# Altium PCB PowerSupply.PcbDoc
Units mm, origin at the board's own origin, x right, y up, seen from the top; angles counter-clockwise.
Board outline 30.1 x 30.23 mm, 2 copper layers (Top Layer, Bottom Layer); 69 components, 44 nets, 231 pads, 0 vias.
Unrouted connection lines stored in the file: 41.
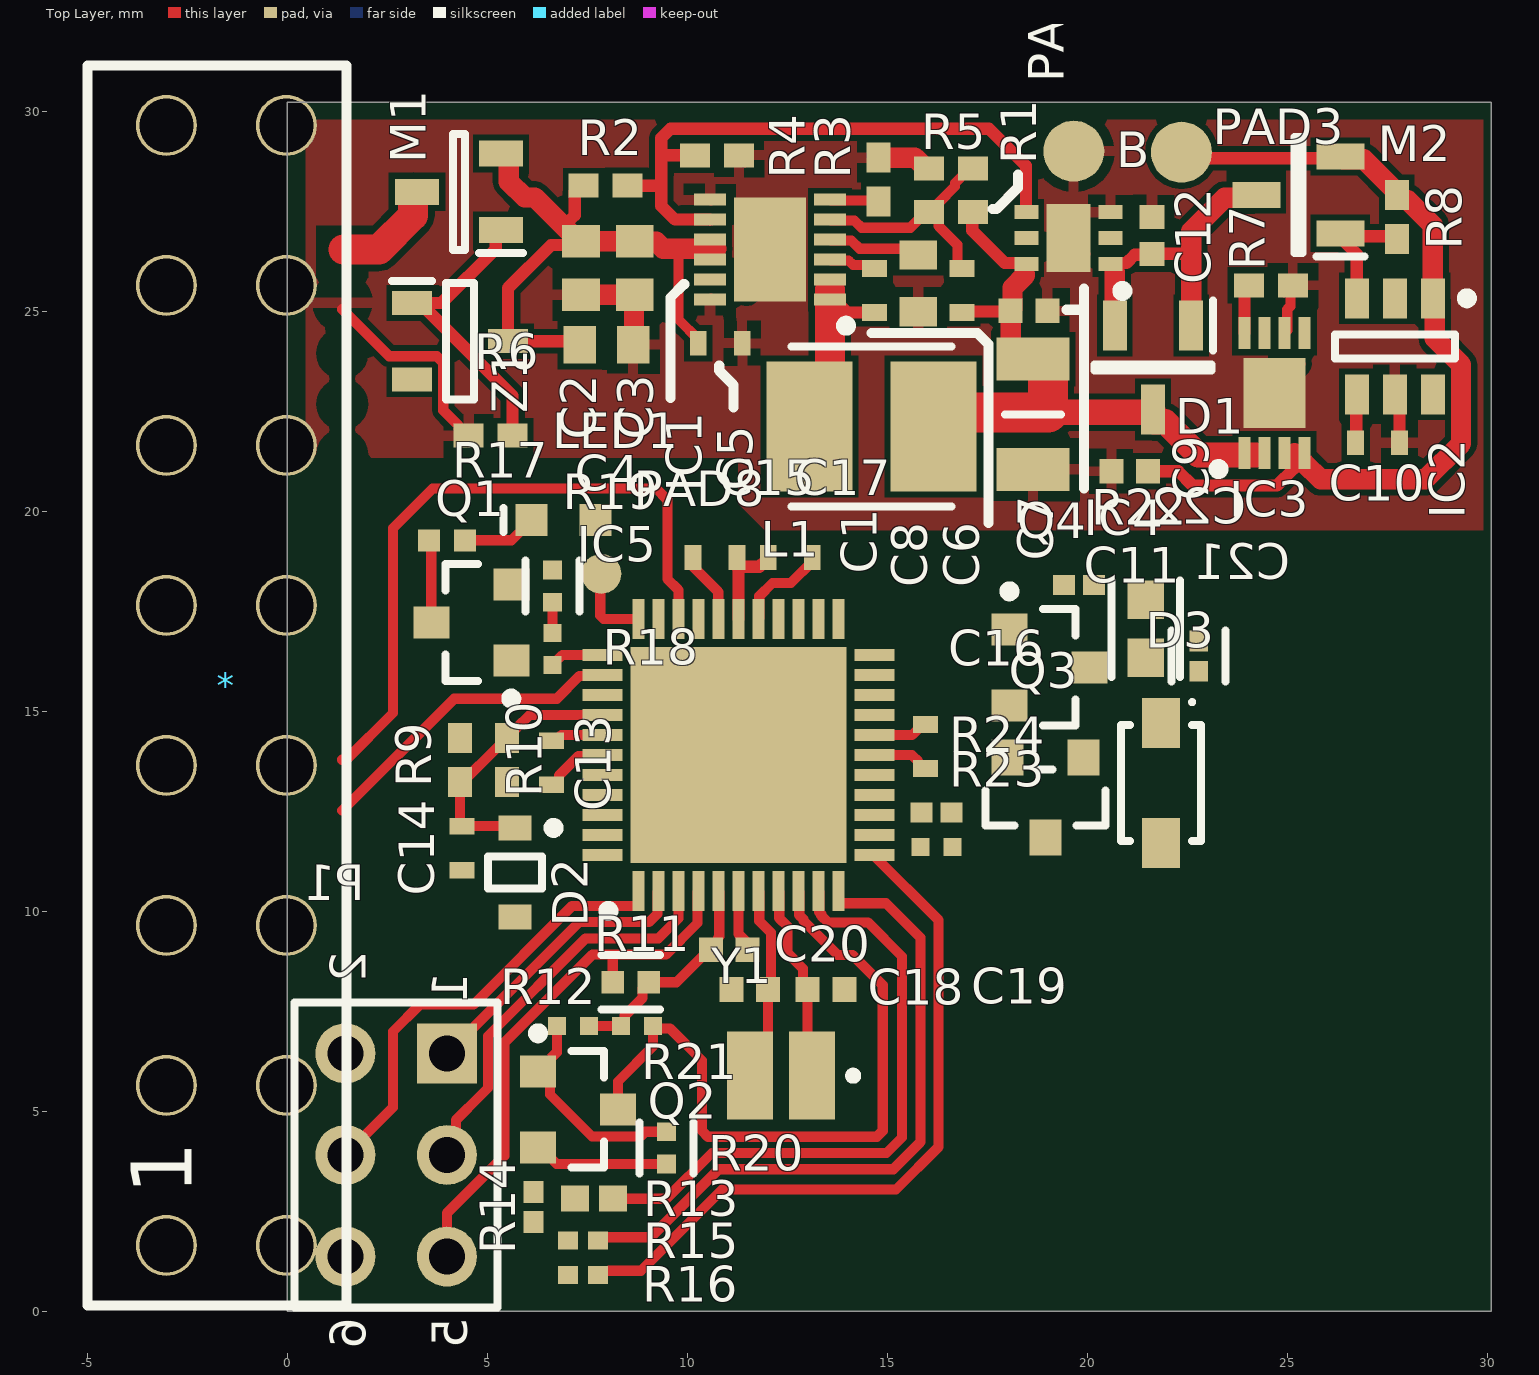
[diagram p0: Top Layer view]
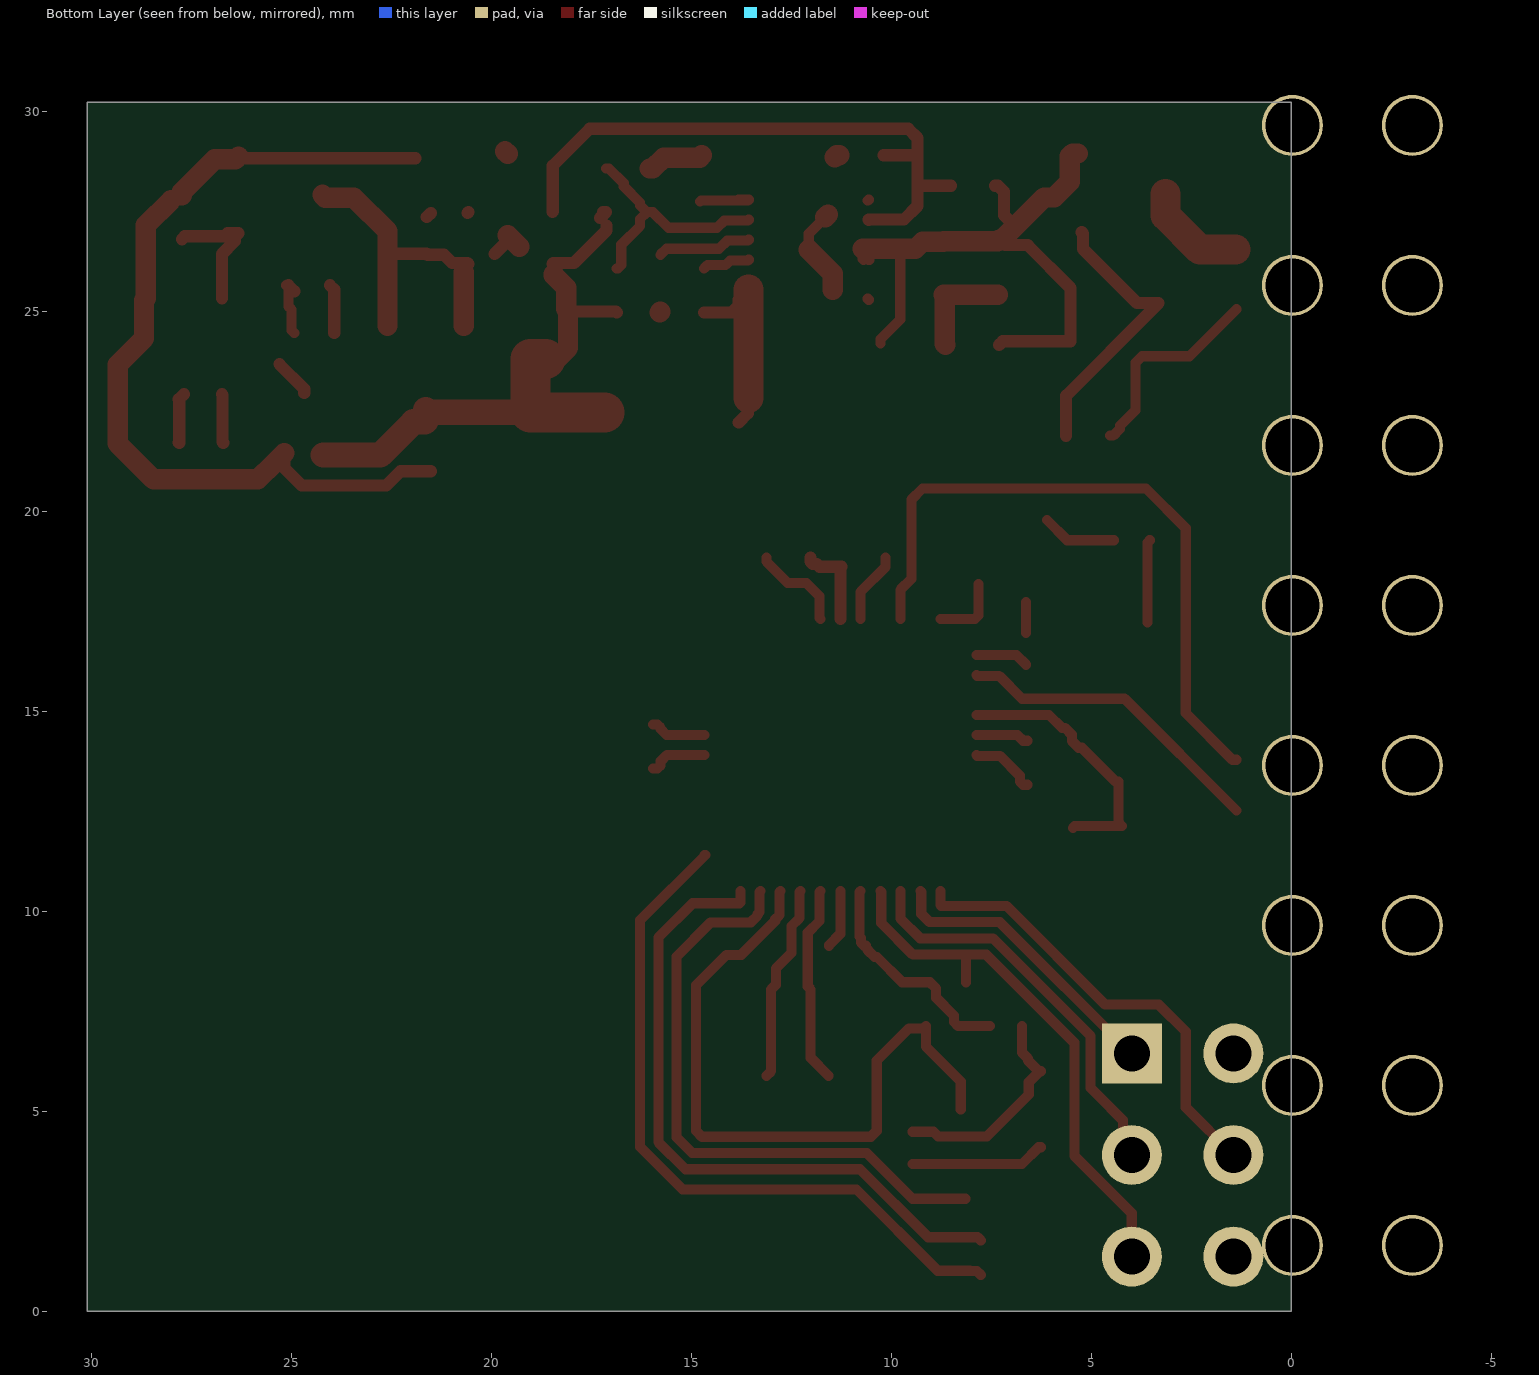
[diagram p1: Bottom Layer view, seen from below]

## Layer stack, top to bottom
Top Solder: solder mask 0.0102, Solder Resist, Dk 3.5
Top Layer: signal copper 0.0356
Dielectric 1: dielectric 0.32, FR-4, Dk 4.8
Bottom Layer: signal copper 0.0356
Bottom Solder: solder mask 0.0102, Solder Resist, Dk 3.5

## Board outline
0,0 30.099,0 30.099,30.226 0,30.226

## Design rules (kind name [scope] priority, off if disabled: settings)
Clearance [All] p1: gap=0.152 ignorepadtopadclearanceinfootprint=FALSE
PolygonConnect [All] p1: connectstyle=Relief reliefconductorwidth=0.254 reliefentries=4 polygonreliefangle="90 Angle" airgapwidth=0.254
RoomDefinition Control [InComponentClass('Control')] p1 off: confinementstyle=ConfineIn formatcopy=TRUE lockcomponents=FALSE outline 31.242,1.397 62.255,1.397 62.255,12.573 31.242,12.573
RoomDefinition PowerSupply [InComponentClass('PowerSupply')] p2 off: confinementstyle=ConfineIn formatcopy=TRUE lockcomponents=FALSE outline 34.027,-24.384 183.252,-24.384 183.252,77.089 34.027,77.089
RoutingVias [All] p1: holewidth=0.711 width=1.27 viastyle="Through Hole" minholewidth=0.711 minwidth=1.27 maxholewidth=0.711 maxwidth=1.27
SolderMaskExpansion [All] p1: expansion=0.102 istentingtop=FALSE
Width [All] p1: maxlimit=1 minlimit=0.254 preferedwidth=0.254
30 further rules are at their usual default settings.

## Classes and differential pairs
component class Control: C13 C14 C15 C16 C17 C18 C19 C20 C21 C22 D2 D3 IC5 LED1 P1 PAD8 Q1 Q2 Q3 Q4 R9 R10 R11 R12 R13 R14 R15 R16 R17 R18 R19 R20 R21 R22 R23 R24 Y1
component class PowerSupply: * C1 C2 C3 C4 C5 C6 C7 C8 C9 C10 C11 C12 D1 IC1 IC2 IC3 IC4 L1 M1 M2 PAD3 PAD4 R1 R2 R3 R4 R5 R6 R7 R8 Z1

## Components (designator, comment, footprint, x,y, rotation, side; value= is the part's Value field where it differs from the comment)
* "OBD2 connector" OBD2 -3.025,1.652 r90 top (schematic designator *1)
C1 "100n" CAPC1005X55N#1 14.681,25.527 r270 top
C2 "4.7u" CAPC1608X100N 7.341,26.086 r90 top
C3 "4.7u" CAPC1608X100N 8.687,26.086 r270 top
C4 "4.7u" CAPC1608X100N 7.976,24.164 r180 top
C5 "100n" CAPC1005X55N#1 10.82,24.206 r180 top
C6 "51p" CAPC1005X55N#1 16.866,25.527 r270 top
C7 "47u" CAPC3216X180N 18.644,22.428 r90 top
C8 "CL10A225KP8NNNC" CAPC1608X90N 15.773,25.705 r90 top
C9 "4.7uF" CAPC1005X55N#2 21.057,21.006 r180 top
C10 "4.7nF" CAPC1005X55N#1 27.254,21.717 r180 top
C11 "1uF" CAPC1005X55N#2 18.542,25.019 r0 top
C12 "2.2uF" CAPC1005X55N#2 21.615,26.899 r90 top
C13 "1u" CAPC1005X55N#1 6.604,13.716 r270 top
C14 "1u" CAPC1005X55N#1 4.369,11.582 r270 top
C15 "1u" CAPC1005X55N#1 10.693,18.847 r0 top
C16 "1u" CAPC1005X55N#1 15.951,14.122 r270 top
C17 "1u" CAPC1005X55N#1 12.573,18.847 r180 top
C18 "8p" CAPC1005X55N#2 11.557,8.052 r0 top
C19 "8p" CAPC1005X55N#2 13.465,8.052 r180 top
C20 "1u" CAPC1005X55N#2 11.049,9.042 r180 top (schematic designator C22)
C21 "0.1u" FP-CL17-IPC_C 22.784,16.383 r90 top
C22 "10u" FP-CL10-IPC_B 21.463,17.069 r90 top (schematic designator C21)
D1 "BAT54CLT1G" SOT96P237X111-3N#1 21.641,23.597 r270 top
D2 "MM3Z3V9ST1G" ONSC-SOD-323-2-477-02_V 5.69,10.973 r270 top
D3 "02SSL20L" SODFL370X100-2N 21.844,13.208 r270 top
IC1 "LMR23615DRRR" SON50P300X300X80-13N-D 12.065,26.543 r180 top
IC2 "S-1011EA0-M6T1U4" SOT95P245X110-6N 27.686,24.13 r270 top
IC3 "MCP73831T-2ACI_MC" SON50P300X200X100-9N-D 24.677,22.96 r90 top
IC4 "TLV75740PDRVR" SON65P200X200X80-7N-D 19.524,26.837 r180 top
IC5 "ATMEGA1284P-MU" QFN50P700X700X100-45N-D 11.274,13.913 r90 top
L1 "4.7u" INDPM4040X190N 14.605,22.123 r0 top
LED1 "150060RS75000" 0603_A 6.909,19.787 r0 top
M1 "DMPH6250SQ-7" SOT96P240X110-3N 4.293,27.991 r180 top
M2 "DMP1045U-7" SOT96P240X120-3N 25.273,27.915 r180 top
P1 "Header 3X2" HDR2X3 3.988,6.452 r270 top
PAD3 "BAT+" PAD#1 22.352,28.981 r90 top
PAD4 "BAT-" PAD#1 19.66,29.007 r90 top
PAD8 "DEBTX" PAD#2 7.849,18.44 r90 top (schematic designator PAD1)
Q1 "BC850CLT1G" ONSC-SOT-23-3-318-08_V 4.597,17.221 r180 top
Q2 "BC850CLT1G" ONSC-SOT-23-3-318-08_V 7.264,5.055 r0 top (schematic designator Q4)
Q3 "DMP1045U-7" FP-SOT23-MFG 18.948,12.852 r270 top (schematic designator Q2)
Q4 "BC850CLT1G" ONSC-SOT-23-3-318-08_V 19.05,16.104 r0 top (schematic designator Q3)
R1 "88.7K" RESC1005X40N 16.586,27.483 r0 top (schematic designator R2)
R2 "6.8M" RESC1005X40N 7.959,28.143 r180 top (schematic designator R3)
R3 "18.7K" RESC1005X40N 14.783,28.296 r270 top (schematic designator R4)
R4 "1.3M" RESC1005X37N 10.744,28.905 r180 top (schematic designator R5)
R5 "22.1K" RESC1005X40N 16.586,28.575 r0 top (schematic designator R6)
R6 "10K" RESC1005X35N 5.08,21.895 r0 top (schematic designator R7)
R7 "18K" RESC1005X40N 24.587,25.654 r180 top (schematic designator R8)
R8 "100K" RESC1005X35N 27.737,27.356 r270 top (schematic designator R9)
R9 "120K" RESC1005X40N 4.318,13.792 r270 top (schematic designator R10)
R10 "39K" RESC1005X40N 5.486,13.792 r270 top (schematic designator R11)
R11 "10K" FP-CRCW0402-e3-IPC_B 8.585,8.23 r180 top (schematic designator R15)
R12 "4.7k" RESC1005X40X25LL05T05 7.137,7.137 r0 top (schematic designator R17)
R13 "2.4k" RESC1005X40X25ML05T10 7.671,2.819 r0 top (schematic designator R19)
R14 "5.6k" RESC1005X40X25LL10T10 6.147,2.616 r90 top (schematic designator R23)
R15 "2.2k" RESC1005X40X25LL05T10 7.391,1.778 r0 top (schematic designator R24)
R16 "2.2k" RESC1005X40X25LL05T10 7.391,0.914 r0 top (schematic designator R25)
R17 "150" RESC1005X40X25NL05T05 3.988,19.279 r0 top (schematic designator R12)
R18 "4.7k" RESC1005X40X25LL05T05 6.629,16.567 r90 top (schematic designator R13)
R19 "47k" FP-CRCW0402-e3-IPC_C 6.629,18.136 r270 top (schematic designator R14)
R20 "47k" FP-CRCW0402-e3-IPC_C 9.474,4.089 r90 top
R21 "4.7k" RESC1005X40X25LL05T05 8.738,7.137 r180 top
R22 "47k" RESC1005X40X25LL10T10 19.787,18.161 r180 top (schematic designator R16)
R23 "4.7k" RESC1005X40X25LL05T05 16.231,11.608 r180 top (schematic designator R18)
R24 "47k" RESC1005X40X25LL10T10 16.231,12.471 r180 top (schematic designator R22)
Y1 "16MHz" XRCHA16M000F0A12R0 12.344,5.893 r180 top
Z1 "BZX84C10LT1G" SOT96P237X111-3N#2 4.318,24.257 r0 top

## Footprints (in the part's own frame and the unit in brackets; to place one, negate y for a bottom-side part, rotate by r counter-clockwise, add the part's x,y. Pads: shape width x height; smd on the part's side, far side on the other; paste and mask are expansions set on the pad)
0603_A [mm] "Chip LED, 2-Leads, Body 1.6x0.8mm, IPC Medium Density"
  rect 0.8x0.8 smd: 1(-0.8,0) 2(0.8,0)
  silkscreen extent -1.5,-0.3 -1.5,0.3, body extent -0.8,-0.4 0.8,0.4, height 0.7
CAPC1005X55N#1 [mm]
  rect 0.42x0.62 smd: 1(-0.55,0) 2(0.55,0)
  body extent -0.5,-0.25 0.5,0.25, height 0.55
CAPC1005X55N#2 [mm]
  rect 0.6x0.62 smd: 1(-0.46,0) 2(0.46,0)
  body extent -0.5,-0.25 0.5,0.25, height 0.55
CAPC1608X90N [mm]
  rect 0.73x0.94 smd: 1(-0.71,0) 2(0.71,0)
  body extent -0.8,-0.4 0.8,0.4, height 0.9
CAPC1608X100N [mm]
  rect 0.81x0.94 smd: 1(-0.67,0) 2(0.67,0)
  body extent -0.8,-0.4 0.8,0.4, height 1
CAPC3216X180N [mm]
  rect 1.07x1.82 smd: 1(-1.38,0) 2(1.38,0)
  silkscreen extent 0,-0.7 0,0.7, body extent -1.6,-0.8 1.6,0.8, height 1.8
FP-CL10-IPC_B [mm]
  rect 0.958x0.912 smd paste+0 mask+0: 1(-0.727,0) 2(0.727,0)
  silkscreen extent -1.21,-0.86 1.21,0.86, body extent -0.8,-0.4 0.8,0.4, height 0.9
FP-CL17-IPC_C [mm]
  rect 0.515x0.472 smd paste+0 mask+0: 1(-0.379,0) 2(0.379,0)
  silkscreen extent -0.64,-0.67 0.64,0.67, body extent -0.5,-0.25 0.5,0.25, height 0.55
FP-CRCW0402-e3-IPC_B [mm]
  rect 0.568x0.572 smd paste+0 mask+0: 1(-0.452,0) 2(0.452,0)
  silkscreen extent -0.74,-0.69 0.74,0.69
FP-CRCW0402-e3-IPC_C [mm]
  rect 0.468x0.472 smd paste+0 mask+0: 1(-0.402,0) 2(0.402,0)
  silkscreen extent -0.64,-0.67 0.64,0.67, body extent -0.74,-0.38 0.74,0.38, height 0.25
FP-SOT23-MFG [mm]
  rect 0.9x0.8 smd paste+0 mask+0: 1(-1,0.95) 2(-1,-0.95) 3(1,0)
  silkscreen extent -0.7,-1.5 0.7,1.5, body extent -1.55,-1.6 1.55,1.6, height 0.25
HDR2X3 [mm] "Connector; Header; 3x2 Position"
  rect 1.5x1.5 hole 0.9: 1(0,0)
  round 1.5 hole 0.9: 2(0,-2.54) 3(2.54,0) 4(2.54,-2.54) 5(5.08,0) 6(5.08,-2.54)
  silkscreen extent -1.27,-3.81 6.35,1.27
INDPM4040X190N [mm]
  rect 2.15x3.25 smd: 1(-1.55,0) 2(1.55,0)
  silkscreen extent -2,-2 2,2, body extent -1.97,-1.97 1.97,1.97, height 1.65
OBD2 [mm]
  round 1.524 hole 1.35: 1(0,0) 2(4,0) 3(8,0) 4(12,0) 5(16,0) 6(20,0) 7(24,0) 8(28,0) 9(28,-3) 10(24,-3) 11(20,-3) 12(16,-3) 13(12,-3) 14(8,-3) 15(4,-3) 16(0,-3)
  silkscreen extent -1.5,-4.5 29.5,1.97, body extent -6.51,-3.44 34.66,22.37, height 16.71
ONSC-SOD-323-2-477-02_V [mm] "SOD, 2-Leads, Body 1.7x1.25mm"
  rect 0.63x0.83 smd: 1(-1.115,0) 2(1.115,0)
  silkscreen extent -1.24,-0.67 0.4,1.09, body extent -0.85,-0.63 0.85,0.63, height 1.06
ONSC-SOT-23-3-318-08_V [mm] "SOT23, 3-Leads, Body 2.92x1.3mm, Pitch 0.95mm"
  rect 0.9x0.8 smd: 1(-1,0.95) 2(-1,-0.95) 3(1,0)
  silkscreen extent -1.13,-1.46 0.65,2.02, body extent -0.65,-1.46 0.65,1.46, height 1.11
PAD#1 [mil]
  round 60 smd: 1(0,0)
PAD#2 [mil]
  round 39.37 smd: 1(0,0)
QFN50P700X700X100-45N-D [mm]
  rect 1x0.3 smd: 1(-3.4,2.5) 2(-3.4,2) 3(-3.4,1.5) 4(-3.4,1) 5(-3.4,0.5) 6(-3.4,0) 7(-3.4,-0.5) 8(-3.4,-1) 9(-3.4,-1.5) 10(-3.4,-2) 11(-3.4,-2.5) 23(3.4,-2.5) 24(3.4,-2) 25(3.4,-1.5) 26(3.4,-1) 27(3.4,-0.5) 28(3.4,0) 29(3.4,0.5) 30(3.4,1) 31(3.4,1.5) 32(3.4,2) 33(3.4,2.5)
  rect 0.3x1 smd: 12(-2.5,-3.4) 13(-2,-3.4) 14(-1.5,-3.4) 15(-1,-3.4) 16(-0.5,-3.4) 17(0,-3.4) 18(0.5,-3.4) 19(1,-3.4) 20(1.5,-3.4) 21(2,-3.4) 22(2.5,-3.4) 34(2.5,3.4) 35(2,3.4) 36(1.5,3.4) 37(1,3.4) 38(0.5,3.4) 39(0,3.4) 40(-0.5,3.4) 41(-1,3.4) 42(-1.5,3.4) 43(-2,3.4) 44(-2.5,3.4)
  rect 5.4x5.4 smd: 45(0,0)
  silkscreen extent -4.02,3.13 -3.78,3.37, body extent -3.55,-3.55 3.55,3.55, height 1
RESC1005X35N [mm]
  rect 0.75x0.6 smd: 1(-0.55,0) 2(0.55,0)
  body extent -0.5,-0.25 0.5,0.25, height 0.35
RESC1005X37N [mm]
  rect 0.75x0.6 smd: 1(-0.55,0) 2(0.55,0)
  body extent -0.5,-0.25 0.5,0.25, height 0.37
RESC1005X40N [mm]
  rect 0.75x0.6 smd: 1(-0.55,0) 2(0.55,0)
  body extent -0.5,0 0.5,0.35, height 0.25
RESC1005X40X25LL05T05 [mm] "Chip Resistor, 2-Leads, Body 1.05x0.55mm, IPC High Density"
  rect 0.45x0.45 smd: 1(-0.4,0) 2(0.4,0)
  body extent -0.53,-0.28 0.53,0.28, height 0.4
RESC1005X40X25LL05T10 [mm] "Chip Resistor, 2-Leads, Body 1.00x0.50mm, IPC High Density"
  rect 0.5x0.45 smd: 1(-0.375,0) 2(0.375,0)
  body extent -0.53,-0.27 0.53,0.28, height 0.4
RESC1005X40X25LL10T10 [mm] "Chip Resistor, 2-Leads, Body 1.00x0.50mm, IPC High Density"
  rect 0.55x0.5 smd: 1(-0.375,0) 2(0.375,0)
  body extent -0.55,-0.3 0.55,0.3, height 0.4
RESC1005X40X25ML05T10 [mm] "Chip Resistor, 2-Leads, Body 1.00x0.50mm, IPC Low Density"
  rect 0.7x0.65 smd: 1(-0.475,0) 2(0.475,0)
  body extent -0.53,-0.27 0.53,0.28, height 0.4
RESC1005X40X25NL05T05 [mm] "Chip Resistor, 2-Leads, Body 1.00x0.50mm, IPC Medium Density"
  rect 0.55x0.55 smd: 1(-0.45,0) 2(0.45,0)
  body extent -0.53,-0.27 0.53,0.28, height 0.4
SODFL370X100-2N [mm] "SODFL, 2-Leads, Body 1,85x3,70mm, IPC Medium Density"
  rect 1.25x0.95 smd: 1(-1.5,0) 2(1.5,0)
  silkscreen extent -2.07,-1 1.45,1, body extent -1.85,-0.97 1.85,0.97, height 1
SON50P300X200X100-9N-D [mm]
  rect 0.8x0.3 smd: 1(-1.5,0.75) 2(-1.5,0.25) 3(-1.5,-0.25) 4(-1.5,-0.75) 5(1.5,-0.75) 6(1.5,-0.25) 7(1.5,0.25) 8(1.5,0.75)
  rect 1.75x1.55 smd: 9(0,0)
  silkscreen extent -2.02,1.27 -1.78,1.52, body extent -1.55,-1 1.55,1, height 1
SON50P300X300X80-13N-D [mm]
  rect 0.8x0.3 smd: 1(-1.5,1.25) 2(-1.5,0.75) 3(-1.5,0.25) 4(-1.5,-0.25) 5(-1.5,-0.75) 6(-1.5,-1.25) 7(1.5,-1.25) 8(1.5,-0.75) 9(1.5,-0.25) 10(1.5,0.25) 11(1.5,0.75) 12(1.5,1.25)
  rect 1.8x2.6 smd mask+0.102: 13(0,0)
  silkscreen extent -2.02,1.78 -1.78,2.02, body extent -1.55,-1.5 1.55,1.5, height 0.8
SON65P200X200X80-7N-D [mm]
  rect 0.6x0.35 smd: 1(-1.05,0.65) 2(-1.05,0) 3(-1.05,-0.65) 4(1.05,-0.65) 5(1.05,0) 6(1.05,0.65)
  rect 1.1x1.7 smd: 7(0,0)
  silkscreen extent -1.48,1.2 -1.23,1.45, body extent -1.05,-1 1.05,1, height 0.8
SOT95P245X110-6N [mm] "SOT23, 6-Leads, Body 2,90x2,45mm, Pitch 0,95mm, IPC Medium Density"
  rect 1x0.6 smd: 1(-1.2,0.95) 2(-1.2,0) 3(-1.2,-0.95) 4(1.2,-0.95) 5(1.2,0) 6(1.2,0.95)
  silkscreen extent -1.32,-1.5 0.3,1.93, body extent -1.3,-1.5 1.3,1.5, height 1.1
SOT96P237X111-3N#1 [mm]
  rect 1.25x0.6 smd: 1(-1.05,0.955) 2(-1.05,-0.955) 3(1.05,0)
  silkscreen extent -1.68,-1.46 0.08,1.51, body extent -1.18,-1.46 1.18,1.46, height 1.11
SOT96P237X111-3N#2 [mm]
  rect 1x0.6 smd: 1(-1.2,0.955) 2(-1.2,-0.955) 3(1.2,0)
  silkscreen extent -1.7,-1.46 0.35,1.51, body extent -1.18,-1.46 1.18,1.46, height 1.11
SOT96P240X110-3N [mm]
  rect 1.1x0.65 smd: 1(-1.05,0.96) 2(-1.05,-0.96) 3(1.05,0)
  silkscreen extent -1.6,-1.45 0.15,1.54, body extent -1.2,-1.45 1.2,1.45, height 1.1
SOT96P240X120-3N [mm]
  rect 1.2x0.65 smd: 1(-1.05,0.96) 2(-1.05,-0.96) 3(1.05,0)
  silkscreen extent -1.65,-1.45 0.1,1.54, body extent -1.2,-1.45 1.2,1.45, height 1.2
XRCHA16M000F0A12R0 [mm]
  rect 1.15x2.2 smd: 1(-0.775,0) 2(0.775,0)
  silkscreen extent -1.9,-0.1 -1.7,0.1

## Part data
C1: library part GRM155R71C104KA88D, "Capacitor", Manufacturer_Name="Murata Electronics", Mouser Part Number=N/A, Arrow Part Number=GRM155R71C104KA88D, Arrow Price/Stock=https://www.arrow.com/en/products/grm155r71c104ka88d/murata-manufacturing, Datasheet Link=http://www.murata.com/~/media/webrenewal/support/library/catalog/products/capacitor/mlcc/c02e.pdf, Height=0.55mm, Manufacturer_Part_Number=GRM155R71C104KA88D
C2 C3 C4: library part TMK107BBJ475MA-T, "Capacitor", Manufacturer_Name="TAIYO YUDEN", Mouser Part Number=963-TMK107BBJ475MA-T, Datasheet Link=https://componentsearchengine.com/Datasheets/1/TMK107BBJ475MA-T.pdf, Height=1mm, Manufacturer_Part_Number=TMK107BBJ475MA-T, Mouser Price/Stock=https://www.mouser.co.uk/ProductDetail/Taiyo-Yuden/TMK107BBJ475MA-T/?qs=lkMpTOwszhelZanMHR3qIw%3D%3D
C5: library part C1005X5R1H104K050BB, "Capacitor", Manufacturer_Name=TDK, Mouser Part Number=810-C1005X5R1H104K, Arrow Part Number=C1005X5R1H104K050BB, Arrow Price/Stock=https://www.arrow.com/en/products/c1005x5r1h104k050bb/tdk, Datasheet Link=https://product.tdk.com/info/en/catalog/datasheets/mlcc_commercial_midvoltage_en.pdf, Height=0.55mm, Manufacturer_Part_Number=C1005X5R1H104K050BB, Mouser Price/Stock=https://www.mouser.co.uk/ProductDetail/TDK/C1005X5R1H104K050BB?qs=dfay7wIA1uFKSdBVUyKezQ%3D%3D
C6: library part GRM1555C1H510JA01D, "Capacitor", Manufacturer_Name="Murata Electronics", Mouser Part Number=81-GRM1555C1H510JA1D, Datasheet Link=http://www.murata.com/~/media/webrenewal/support/library/catalog/products/capacitor/mlcc/c02e.pdf, Height=0.55mm, Manufacturer_Part_Number=GRM1555C1H510JA01D, Mouser Price/Stock=http://www.mouser.com/Search/ProductDetail.aspx?qs=ouTquLLW2S53SYZ4Zli0Dw%3d%3d
C7: library part GRM31CR61A476KE15L, "Capacitor", Manufacturer_Name="Murata Electronics", Mouser Part Number=81-GRM31CR61A476KE5L, Arrow Part Number=GRM31CR61A476KE15L, Arrow Price/Stock=https://www.arrow.com/en/products/grm31cr61a476ke15l/murata-manufacturing, Datasheet Link=http://www.murata.com/~/media/webrenewal/support/library/catalog/products/capacitor/mlcc/c02e.pdf, Height=1.8mm, Manufacturer_Part_Number=GRM31CR61A476KE15L, Mouser Price/Stock=https://www.mouser.co.uk/ProductDetail/Murata-Electronics/GRM31CR61A476KE15L?qs=18WYLvqSxEpYiQEknw8A%2Fg%3D%3D
C8: "Capacitor", Manufacturer_Name="Samsung Electro-Mechanics", Mouser Part Number=N/A, Arrow Part Number=CL10A225KP8NNNC, Arrow Price/Stock=https://www.arrow.com/en/products/cl10a225kp8nnnc/samsung-electro-mechanics, Datasheet Link=http://www.samsungsem.com/kr/support/product-search/mlcc/CL10A225KP8NNNC.jsp, Height=0.9mm, Manufacturer_Part_Number=CL10A225KP8NNNC, Mouser Price/Stock=https://www.mouser.co.uk/ProductDetail/Samsung-Electro-Mechanics/CL10A225KP8NNNC?qs=hqM3L16%252Bxldb5UYUGQVB5Q%3D%3D
C9: library part GRM155R60J475ME87D, "Capacitor", Manufacturer_Name="Murata Electronics", Mouser Part Number=81-GRM155R60J475ME8D, Arrow Part Number=GRM155R60J475ME87D, Arrow Price/Stock=https://www.arrow.com/en/products/grm155r60j475me87d/murata-manufacturing, Datasheet Link=http://www.murata.com/~/media/webrenewal/support/library/catalog/products/capacitor/mlcc/c02e.pdf, Height=0.55mm, Manufacturer_Part_Number=GRM155R60J475ME87D, Mouser Price/Stock=https://www.mouser.co.uk/ProductDetail/Murata-Electronics/GRM155R60J475ME87D/?qs=pTGEtN%252BMLlBnU9jM8bPB0Q%3D%3D
C10: library part GRM155R71H472JA01J, "Capacitor", Manufacturer_Name="Murata Electronics", Mouser Part Number=81-GRM155R71H472JA1J, Datasheet Link=http://www.murata.com/~/media/webrenewal/support/library/catalog/products/capacitor/mlcc/c02e.pdf, Height=0.55mm, Manufacturer_Part_Number=GRM155R71H472JA01J, Mouser Price/Stock=https://www.mouser.com/Search/Refine.aspx?Keyword=81-GRM155R71H472JA1J
C11: library part EMK105BJ105KVHF, "Capacitor X5R 10% 0402", Manufacturer_Name="TAIYO YUDEN", Mouser Part Number=963-EMK105BJ105KVHF, Datasheet Link=https://componentsearchengine.com/Datasheets/2/EMK105BJ105KVHF.pdf, Height=0.55mm, Manufacturer_Part_Number=EMK105BJ105KVHF, Mouser Price/Stock=https://www.mouser.co.uk/ProductDetail/Taiyo-Yuden/EMK105BJ105KVHF?qs=qPaGMJUC%252BSsQbatR4qRfmg%3D%3D
C12: library part TMK105CBJ225KV-F, "Capacitor X5R 10% 0402", Manufacturer_Name="TAIYO YUDEN", Mouser Part Number=963-TMK105CBJ225KV-F, Datasheet Link=https://mouser.componentsearchengine.com/Datasheets/1/TMK105CBJ225KV-F.pdf, Height=0.55mm, Manufacturer_Part_Number=TMK105CBJ225KV-F, Mouser Price/Stock=https://www.mouser.co.uk/ProductDetail/Taiyo-Yuden/TMK105CBJ225KV-F?qs=lkMpTOwszhcv20NXOV0AGQ%3D%3D
C13 C14 C15 C16 C17 C20: library part EMK105BJ105KVHF, "Capacitor", Manufacturer_Name="TAIYO YUDEN", Mouser Part Number=963-EMK105BJ105KVHF, Datasheet Link=https://componentsearchengine.com/Datasheets/2/EMK105BJ105KVHF.pdf, Height=0.55mm, Manufacturer_Part_Number=EMK105BJ105KVHF, Mouser Price/Stock=https://www.mouser.co.uk/ProductDetail/Taiyo-Yuden/EMK105BJ105KVHF?qs=qPaGMJUC%252BSsQbatR4qRfmg%3D%3D
C18 C19: library part GRM1551X1H8R0DA01D, "Capacitor", Manufacturer_Name="Murata Electronics", Datasheet Link=http://www.murata.com/~/media/webrenewal/support/library/catalog/products/capacitor/mlcc/c02e.pdf, Height=0.55mm, Manufacturer_Part_Number=GRM1551X1H8R0DA01D
C21: library part CMP-13271-001069-1, "Cap Ceramic 100nF 10V X7R ±10% SMD 0402 +125°C Paper T/R", Capacitance=100nF, Case Code (Imperial)=0402, Case Code (Metric)=1005, Dielectric=X7R, Max Operating Temperature=125°C, Min Operating Temperature=-55°C, Package Quantity=1, Tolerance=10%, Voltage Rating=10V, Case/Package=0402, Contact Plating=Tin, Depth=0.5mm, Height=0.5mm, Length=1mm, Mount="Surface Mount", Packaging="Tape and Reel", Radiation Hardening=No, Thickness=0.022inch, Width=0.02inch
C22: library part CMP-13271-003245-1, "Cap Ceramic 10uF 10V X5R ±10% Pad SMD 0603 +85°C T/R", Capacitance=10uF, Case/Package=0603, Dielectric=X5R, Max Operating Temperature=85°C, Min Operating Temperature=-55°C, Package Quantity=10000, Tolerance=10%, Voltage Rating=10V, Depth=0.8mm, Height=0.8mm, Lead Free="Lead Free", Length=1.6mm, Mount="Surface Mount", Packaging="Tape and Reel", Radiation Hardening=No, Thickness=0.035inch, Voltage Rating (DC)=10V, Width=0.031inch
D1: "Diode", Manufacturer_Name="ON Semiconductor", Mouser Part Number=863-BAT54CLT1G, Arrow Part Number=BAT54CLT1G, Arrow Price/Stock=https://www.arrow.com/en/products/bat54clt1g/on-semiconductor, Datasheet Link=http://www.onsemi.com/pub/Collateral/BAT54CLT1-D.PDF, Height=1.11mm, Manufacturer_Part_Number=BAT54CLT1G, Mouser Price/Stock=https://www.mouser.co.uk/ProductDetail/ON-Semiconductor/BAT54CLT1G?qs=vLkC5FC1VN%252BEteCXar4p7g%3D%3D
D2: library part CMP-1060-00649-1, "Zener Voltage Regulator, 300 mW, Tight Tolerance Portfolio, 2-Pin SOD-323, Pb-Free, Tape and Reel", Manufacturer="On Semiconductor", ComponentLink1Description="Manufacturer URL", ComponentLink1URL=http://www.onsemi.com/, ComponentLink2Description=Datasheet, ComponentLink2URL=http://www.onsemi.cn/pub_link/Collateral/MM3Z2V4ST1-D.PDF, ComponentLink3Description="Package Specification", ComponentLink3URL=http://www.onsemi.com/pub_link/Collateral/477-02.PDF.1, DatasheetVersion="Rev. 21", Mounting Technology="Surface Mount", P Max (W)=0.3, PackageDescription="2-Pin SOD, Body 1.7 x 1.25 mm", PackageReference=SOD-323-2-477-02, PackageVersion="Rev. H, 03/2007", Packing="Tape and Reel", PartNumber=MM3Z3V9ST1G, RoHS=Pb-Free
D3: "SCHOTTKY DIODE https://eu.mouser.com/datasheet/2/345/02ssl20l-02ssl40l-1107799.pdf"
IC1: "Integrated Circuit", Manufacturer_Name="Texas Instruments", Mouser Part Number=595-LMR23615DRRR, Arrow Part Number=LMR23615DRRR, Arrow Price/Stock=https://www.arrow.com/en/products/lmr23615drrr/texas-instruments, Datasheet Link=http://www.ti.com/lit/ds/symlink/lmr23615.pdf, Height=0.8mm, Manufacturer_Part_Number=LMR23615DRRR, Mouser Price/Stock=https://www.mouser.co.uk/ProductDetail/Texas-Instruments/LMR23615DRRR?qs=fAHHVMwC%252BbjN885utBLFRg%3D%3D
IC2: "Voltage detector"
IC3: "Integrated Circuit", Arrow Part Number=MCP73831T-2ACI/MC, Manufacturer_Name=Microchip, Mouser Part Number=579-MCP73831T-2ACIMC, Arrow Price/Stock=https://www.arrow.com/en/products/mcp73831t-2acimc/microchip-technology, Datasheet Link=http://ww1.microchip.com/downloads/en/DeviceDoc/20001984g.pdf, Height=1mm, Manufacturer_Part_Number=MCP73831T-2ACI/MC, Mouser Price/Stock=https://www.mouser.co.uk/ProductDetail/Microchip-Technology/MCP73831T-2ACI-MC?qs=yUQqVecv4quJ3ICqm%2FGZxw%3D%3D
IC4: "Power Supply", Manufacturer_Name="Texas Instruments", Mouser Part Number=595-TLV75740PDRVR, Arrow Part Number=TLV75740PDRVR, Arrow Price/Stock=https://www.arrow.com/en/products/tlv75740pdrvr/texas-instruments, Datasheet Link=http://www.ti.com/lit/gpn/tlv757p, Height=0.8mm, Manufacturer_Part_Number=TLV75740PDRVR, Mouser Price/Stock=https://www.mouser.co.uk/ProductDetail/Texas-Instruments/TLV75740PDRVR?qs=W0yvOO0ixfHCQhbebwDO0Q%3D%3D
IC5: "Integrated Circuit", Manufacturer_Name=Microchip, Mouser Part Number=556-ATMEGA1284P-MU, Arrow Part Number=ATMEGA1284P-MU, Arrow Price/Stock=https://www.arrow.com/en/products/atmega1284p-mu/microchip-technology, Datasheet Link=http://www.atmel.com/Images/Atmel-8272-8-bit-AVR-microcontroller-ATmega164A_PA-324A_PA-644A_PA-1284_P_datasheet.pdf, Height=1mm, Manufacturer_Part_Number=ATMEGA1284P-MU, Mouser Price/Stock=https://www.mouser.co.uk/ProductDetail/Microchip-Technology-Atmel/ATMEGA1284P-MU?qs=K8BHR703ZXga7jaZYyDrdw%3D%3D
L1: library part IFSC1515AHER4R7M01, "Inductor", Manufacturer_Name=Vishay, Mouser Part Number=70-IFSC1515AHER4R7M0, Arrow Part Number=IFSC1515AHER4R7M01, Arrow Price/Stock=https://www.arrow.com/en/products/ifsc1515aher4r7m01/vishay, Datasheet Link=https://www.vishay.com/docs/34295/sc15ah01.pdf, Height=1.9mm, Manufacturer_Part_Number=IFSC1515AHER4R7M01, Mouser Price/Stock=https://www.mouser.co.uk/ProductDetail/Vishay-Dale/IFSC1515AHER4R7M01?qs=InciI0EUQ9bFD1zWABQODQ%3D%3D
LED1: library part CMP-1426-00001-1, "SMD mono-color Chip LED, WL-SMCW, Red", Color=Red, Manufacturer="Wuerth Elektronik", ComponentLink1Description="Manufacturer URL", ComponentLink1URL=http://www.we-online.com, ComponentLink2Description=Datasheet, ComponentLink2URL=http://katalog.we-online.com/led/datasheet/150060RS75000.pdf, PackageReference=0603_A, PartNumber=150060RS75000
M1: "MOSFET (P-Channel)", Manufacturer_Name="Diodes Inc.", Mouser Part Number=621-DMPH6250SQ-7, Arrow Part Number=DMPH6250SQ-7, Arrow Price/Stock=https://www.arrow.com/en/products/dmph6250sq-7/diodes-incorporated, Datasheet Link=https://www.diodes.com/assets/Datasheets/DMPH6250SQ.pdf, Height=1.1mm, Manufacturer_Part_Number=DMPH6250SQ-7, Mouser Price/Stock=https://www.mouser.co.uk/ProductDetail/Diodes-Incorporated/DMPH6250SQ-7?qs=%252BEew9%252B0nqrDz2S8tY0%252BBKg%3D%3D
M2: "Integrated Circuit", Manufacturer_Name="Diodes Inc.", Mouser Part Number=621-DMP1045U-7, Arrow Part Number=DMP1045U-7, Arrow Price/Stock=https://www.arrow.com/en/products/dmp1045u-7/diodes-incorporated, Datasheet Link=http://docs-emea.rs-online.com/webdocs/1325/0900766b813253b4.pdf, Height=1.2mm, Manufacturer_Part_Number=DMP1045U-7, Mouser Price/Stock=https://www.mouser.co.uk/ProductDetail/Diodes-Incorporated/DMP1045U-7?qs=T%2FOtf55vL7eEKnIWhgMvTQ%3D%3D
P1: library part "Header 3", "Header, 3-Pin", LatestRevisionDate=17-Jul-2002, LatestRevisionNote="Re-released for DXP Platform.", Publisher="Altium Limited"
PAD3 PAD4 PAD8: library part PAD, "just a pad"
Q1 Q2 Q4: library part CMP-1048-00709-1, "General Purpose Transistor, NPN Silicon, 3-Pin SOT-23, Pb-Free, Tape and Reel", Manufacturer="On Semiconductor", ComponentLink1Description="Manufacturer URL", ComponentLink1URL=http://www.onsemi.com/, ComponentLink2Description=Datasheet, ComponentLink2URL=http://www.onsemi.cn/pub_link/Collateral/BC846ALT1-D.PDF, ComponentLink3Description="Package Specification", ComponentLink3URL=http://www.onsemi.cn/pub_link/Collateral/318-08.PDF, DatasheetVersion="Rev. 11", fT Min (MHz)=100, IC Continuous (A)=0.1, Mounting Technology="Surface Mount", PackageDescription="3-Pin Small Outline Transistor, Body 2.92 x 1.3 mm, Pitch 0.95 mm", PackageReference=SOT-23-3-318-08, PackageVersion="Rev. AP, 11/2009", Packing="Tape and Reel", PartNumber=BC850CLT1G, Polarity=NPN, RoHS=TRUE
Q3: library part CMP-12801-000025-1, "MOSFET P-CH 12V 4A SOT23", Continuous Drain Current=4A, Drain To Source Breakdown Voltage=-12V, Drain To Source Resistance=26mΩ, Gate To Source Voltage=8V, Input Capacitace At Vds="1357pF @ -10V", Manufacturer="Diodes Inc.", Max Junction Temp=+150°C, Package=SOT23, Power Dissipation=0.8W, Pulse Drain Current=40A, Temperature="-55°C to +150°C", Temperature Range Low=-55°C, Typ Forward Diode Voltage=-0.6V, Automotive=No, Automotive Grade=NA, Category=Trans, ComponentLink2Description=Datasheet, ComponentLink2URL=https://www.diodes.com/assets/Datasheets/DMP1045U.pdf, Depletion Mode=False, Device Class L1="Discrete Semiconductors", Device Class L2=Transistors, Device Class L3=MOSFETs, Digikey Description="MOSFET P-CH 12V 4A SOT23", Drain To Source Voltage=-12V, Footprint Url=https://www.diodes.com/assets/Package-Files/SOT23.pdf, Gate Charge At Vgs="15.8nC @ -4.5V", Height=1.1mm, Ipc Land Pattern Name=SOT92P240X102-3, Lead Free=Yes, Manufacturer Part Number=DMP1045U-7, Mouser Description="P-Channel 12 V 31 mOhm Surface Mount Enhancement Mode Mosfet - SOT-23-3", Number Of Channels=1, Number Of P Channels=1, Octopart=https://octopart.com/dmp1045u-7-diodes+inc.-20474459, RoHS=TRUE, Rthja Max=168°C/W, Standoff Height=0.013mm, Temperature Range High=+150°C, Threshold Vgs Max=-1V, Threshold Vgs Min=-0.3V, Turn Off Delay Time=91.2ns, Turn On Delay Time=15.7ns
R1: library part CRCW040288K7FKEDHP, "Resistor", Manufacturer_Name=Vishay, Datasheet Link=http://www.vishay.com/docs/20035/dcrcwe3.pdf, Height=0.4mm, Manufacturer_Part_Number=CRCW040288K7FKEDHP
R2: library part CRCW04026M80FKED, "Resistor", Manufacturer_Name=Vishay, Datasheet Link=http://www.vishay.com/docs/20035/dcrcwe3.pdf, Height=0.4mm, Manufacturer_Part_Number=CRCW04026M80FKED
R3: library part CR0402-FX-1872GLF, "Resistor", Manufacturer_Name=Bourns, Mouser Part Number=652-CR0402-FX1872GLF, Arrow Part Number=CR0402-FX-1872GLF, Arrow Price/Stock=https://www.arrow.com/en/products/cr0402-fx-1872glf/bourns, Datasheet Link=https://www.bourns.com/pdfs/CR0402.pdf, Height=0.4mm, Manufacturer_Part_Number=CR0402-FX-1872GLF, Mouser Price/Stock=https://www.mouser.com/Search/Refine.aspx?Keyword=652-CR0402-FX1872GLF
R4: library part AC0402FR-071M3L, "Resistor", Manufacturer_Name="YAGEO (PHYCOMP)", Mouser Part Number=603-AC0402FR-071M3L, Datasheet Link=https://componentsearchengine.com//AC0402FR-071M3L.pdf, Height=0.37mm, Manufacturer_Part_Number=AC0402FR-071M3L, Mouser Price/Stock=https://www.mouser.co.uk/ProductDetail/Yageo/AC0402FR-071M3L?qs=tggtontpCXOM1Z4nW1eHfg%3D%3D
R5: library part CRCW040222K1FKED, "Resistor", Manufacturer_Name=Vishay, Mouser Part Number=71-CRCW0402-22.1K-E3, Arrow Part Number=CRCW040222K1FKED, Arrow Price/Stock=https://www.arrow.com/en/products/crcw040222k1fked/vishay, Datasheet Link=http://www.vishay.com/docs/20035/dcrcwe3.pdf, Height=0.4mm, Manufacturer_Part_Number=CRCW040222K1FKED, Mouser Price/Stock=https://www.mouser.co.uk/ProductDetail/Vishay-Dale/CRCW040222K1FKED?qs=oYI6rOI5zkv%2FV1tTZIsV7A%3D%3D
R6: library part CRCW040210K0FKEDC, "Resistor", Manufacturer_Name=Vishay, Mouser Part Number=71-CRCW040210K0FKEDC, Arrow Part Number=CRCW040210K0FKEDC, Arrow Price/Stock=https://www.arrow.com/en/products/crcw040210k0fkedc/vishay, Datasheet Link=https://rs.componentsearchengine.com/Datasheets/2/CRCW040210K0FKEDC.pdf, Height=0.35mm, Manufacturer_Part_Number=CRCW040210K0FKEDC, Mouser Price/Stock=https://www.mouser.co.uk/ProductDetail/Vishay-Dale/CRCW040210K0FKEDC?qs=E3Y5ESvWgWPiNLcGzwCGPg%3D%3D
R7: library part CRCW040218K0FKED, "Resistor", Manufacturer_Name=Vishay, Mouser Part Number=71-CRCW0402-18K-E3, Datasheet Link=http://www.vishay.com/docs/20035/dcrcwe3.pdf, Height=0.4mm, Manufacturer_Part_Number=CRCW040218K0FKED, Mouser Price/Stock=https://www.mouser.co.uk/ProductDetail/Vishay-Dale/CRCW040218K0FKED?qs=QPqDnsKvzKeL5ck4joh1Cw%3D%3D
R8: library part CRCW0402100KFKEDC, "Resistor", Manufacturer_Name=Vishay, Mouser Part Number=71-CRCW0402100KFKEDC, Arrow Part Number=CRCW0402100KFKEDC, Arrow Price/Stock=https://www.arrow.com/en/products/crcw0402100kfkedc/vishay, Datasheet Link=http://www.vishay.com/docs/28773/crcwce3.pdf, Height=0.35mm, Manufacturer_Part_Number=CRCW0402100KFKEDC, Mouser Price/Stock=https://www.mouser.co.uk/ProductDetail/Vishay-Dale/CRCW0402100KFKEDC?qs=E3Y5ESvWgWPiKlL6PvtQMQ%3D%3D
R9: library part ERJ-2RKD1203X, "Resistor", Manufacturer_Name=Panasonic, Datasheet Link=https://industrial.panasonic.com/cdbs/www-data/pdf/RDA0000/AOA0000C86.pdf, Height=0.4mm, Manufacturer_Part_Number=ERJ-2RKD1203X
R10: library part ERJ-2RHD3902X, "Resistor", Manufacturer_Name=Panasonic, Mouser Part Number=667-ERJ-2RHD3902X, Datasheet Link=http://docs-europe.electrocomponents.com/webdocs/13ba/0900766b813ba21b.pdf, Height=0.4mm, Manufacturer_Part_Number=ERJ-2RHD3902X, Mouser Price/Stock=https://www.mouser.com/Search/Refine.aspx?Keyword=667-ERJ-2RHD3902X
R11: library part CMP-2002-08135-2, "RES SMD 10K OHM 1% 1/16W 0402", Case Code (Imperial)=0402, Case Code (Metric)=1005, Max Operating Temperature=155°C, Max Power Dissipation=63mW, Min Operating Temperature=-55°C, Package Quantity=10, Resistance=10kR, Temperature Coefficient=100ppm/°C, Tolerance=1%, Voltage Rating=50V, Case/Package=0402, Composition="Thick Film", Contact Plating=Tin, Depth=0.5mm, Features="Automotive AEC-Q200", Height=0.35mm, Lead Free="Lead Free", Length=1mm, Military Standard=Not, Mount="Surface Mount", Number of Pins=2, Number of Terminations=2, Packaging="Tape and Reel", Power Rating=63mW, Radiation Hardening=No, Termination=SMD/SMT, Voltage Rating (DC)=50V, Weight=2.3E-05oz, Width=0.02inch
R12 R18 R21 R23: library part CMP-2002-01154-4, "Chip Resistor, 4.7 KOhm, +/- 1%, 0.1 W, -55 to 155 degC, 0402 (1005 Metric), RoHS, Tape and Reel", Case Code (Imperial)=0402, Case Code (Metric)=1005, Max Operating Temperature="155 degC", Min Operating Temperature="-55 degC", Package Quantity=1, PartNumber=ERJ-2RKF4701X, Power Rating="100 mW", Resistance="4.7 KOhm", Tolerance=1%, Voltage Rating="50 V", Case\/Package=0402, ComponentLink1Description="Manufacturer URL", ComponentLink1URL=http://www.panasonic.com/, ComponentLink2Description=Datasheet, ComponentLink2URL=http://industrial.panasonic.com/cdbs/www-data/pdf/RDA0000/AOA0000C86.pdf, DatasheetVersion=04/2015, Height="0.35 mm", Length="1 mm", Mount="Surface Mount", Mounting Technology="Surface Mount", PackageDescription="2-Pin Surface Mount Device, Body 1 x 0.5 mm", PackageReference=0402, Packaging="Cut Tape", Pins=2, Radiation Hardening=No, REACH SVHC=Yes, RoHSCompliant=true, Width="0.5 mm"
R13: library part CMP-2002-07016-1, Manufacturer="Yageo / Phycomp", Part Number=RC0402FR-072K4L
R14: library part CMP-2002-05747-1, Manufacturer="TE Connectivity / AMP", Part Number=CRG0402F5K6
R15 R16: library part CMP-2002-07873-1, Manufacturer=Yageo, Part Number=RC0402FR-132K2L
R17: library part CMP-1011-00415-2, Manufacturer=Panasonic, Part Number=ERJ-2RKF1500X
R19 R20: library part CMP-02407-007705-1, "RES Thick Film, 47kΩ, 1%, 0.063W, 100ppm/°C, 0402", Case Code (Imperial)=0402, Case Code (Metric)=1005, Max Operating Temperature=155°C, Min Operating Temperature=-55°C, Package Quantity=10000, Power Rating=63mW, Resistance=47kR, Temperature Coefficient=100ppm/°C, Tolerance=1%, Voltage Rating=50V, Case/Package=0402, Composition="Thick Film", Contact Plating=Tin, Depth=0.5mm, Height=0.35mm, Lead Free="Lead Free", Length=1mm, Military Standard=Not, Mount="Surface Mount", Number of Terminations=2, Packaging="Tape and Reel", Radiation Hardening=No, Termination=SMD/SMT, Voltage Rating (DC)=50V, Weight=2.3E-05oz, Width=0.5mm, Working Voltage=50V
R22 R24: library part CMP-2002-05738-1, Manufacturer="TE Connectivity / AMP", Part Number=CRG0402F47K
Y1: library part XRCHA16M000F0A12R0, "Crystal or Oscillator", Manufacturer_Name="Murata Electronics", Mouser Part Number=81-XRCHA16M000F0A120, Arrow Part Number=XRCHA16M000F0A12R0, Arrow Price/Stock=https://www.arrow.com/en/products/xrcha16m000f0a12r0/murata-manufacturing, Datasheet Link=https://www.murata.com/~/media/webrenewal/products/timingdevice/crystalu/flyers/vppt-hcrj078-d.ashx?la=en-us, Height=0.8mm, Manufacturer_Part_Number=XRCHA16M000F0A12R0, Mouser Price/Stock=https://www.mouser.co.uk/ProductDetail/Murata-Electronics/XRCHA16M000F0A12R0?qs=QzBtWTOodeVgxex%2F1hG8AA%3D%3D
Z1: "Zener Diode", Manufacturer_Name="ON Semiconductor", Mouser Part Number=863-BZX84C10LT1G, Arrow Part Number=BZX84C10LT1G, Arrow Price/Stock=https://www.arrow.com/en/products/bzx84c10lt1g/on-semiconductor, Datasheet Link=http://www.onsemi.com/pub/Collateral/BZX84C2V4LT1-D.PDF, Height=1.11mm, Manufacturer_Part_Number=BZX84C10LT1G, Mouser Price/Stock=https://www.mouser.co.uk/ProductDetail/ON-Semiconductor/BZX84C10LT1G?qs=vNc2DXHODiLQ48WwgnpYlA%3D%3D

## Nets (pads, with @x,y where several pads share a name; then routed paths per layer and width w, separated by ;. In a path a pad name is that pad's centre, name@x,y a point inside that pad or via, vN(x,y) a via of type N, cw(c..) or ccw(c..) an arc to the next point about the centre after c; other vN are vias at no path point)
+12: M1.3 | length 2.6
  Top Layer w0.75: 1.397,26.543 2.286,26.543 3.141,27.398 M1.3@3.141,27.94
BAT+: C9.1 IC2.1 IC3.3 IC3.4 M2.2 PAD3.1 R8.1 | length 22.1
  Top Layer w0.305: C9.1 22.274,21.006 22.629,20.65 24.74,20.65 25.171,21.082 25.171,21.455 25.177,21.46 ; PAD3.1@21.895,28.829 26.277,28.829 M2.2
  Top Layer w0.508: 25.177,21.46 25.427,21.21 25.834,20.803 28.448,20.803 29.342,21.697 29.342,23.667 28.682,24.328 28.682,25.284 IC2.1 28.636,27.156 R8.1@28.008,27.785 ; M2.2 26.394,28.804 26.914,28.804 27.737,27.981 R8.1
DCEN: IC1.8 IC4.4 R2.1 R4.2 | length 15.6
  Top Layer w0.305: R2.1 9.271,28.143 9.347,28.067 ; R4.2 9.449,28.905 9.347,28.804 ; IC1.8 10.563,27.295 9.687,27.295 9.347,27.635 9.347,28.067 ; IC4.4 18.466,27.496 18.466,28.641 17.541,29.566 9.576,29.566 9.347,29.337 9.347,28.804 ; 9.347,28.067 9.347,28.804
DEBTX: IC5.33 PAD8.1 | length 1.8
  Top Layer w0.254: PAD8.1@7.823,18.186 7.823,17.399 7.91,17.313 IC5.33
GND: C2.1 C3.2 C4.1 C5.1 C7.1 C8.1 C9.2 C10.1 C11.2 C12.2 C13.2 C14.2 C15.2 C16.1 C17.2 C18.1 C19.1 C20.1 C21.2 C22.2 D2.2 IC1.7 IC1.12 IC1.13 IC2.5 IC3.6 IC3.9 IC4.3 IC4.7 IC5.6 IC5.18 IC5.28 IC5.39 IC5.45 P1.6 PAD4.1 Q1.2 Q4.2 R3.1 R4.1 R5.1 R6.1 R7.1 R10.2 R14.1 R19.1 R24.2 | length 23.7
  Top Layer w0.254: 1.372,25.054 2.545,23.881 3.734,23.881 3.897,23.718 3.897,22.527 4.282,22.143 4.282,22.068 4.455,21.895 R6.1 ; C13.2 6.704,13.166 6.787,13.249 6.787,13.391 7.286,13.89 7.851,13.89 IC5.39 ; IC1.12 IC1.12@10.588,25.316 ; IC1.7 IC1.7@10.588,27.77 ; IC5.6 11.274,9.44 11.56,9.154 C20.1@11.56,9.144 ; IC1.13@11.652,27.356 12.065,26.943 IC1.13 ; IC5.18 15.619,14.413 15.768,14.561 15.768,14.589 15.851,14.672 C16.1 ; IC3.6 24.997,24.531 24.997,25.053 25.074,25.13 25.074,25.654 R7.1
  Top Layer w0.305: IC5.28 11.274,18.588 11.243,18.618 11.794,18.618 11.865,18.689 11.965,18.689 12.023,18.747 C17.2 ; IC4.7 IC4.7@19.922,26.44 ; IC4.3 IC4.3@20.597,27.465 ; C12.2@21.509,27.465 C12.2 ; IC3.9 24.677,23.06 IC3.9@25.299,23.683 ; R7.1@24.927,25.506 R7.1@25.074,25.654 ; IC2.5 27.813,22.803 27.804,22.794 C10.1 C10.1@27.813,21.726
  Top Layer w0.508: C2.1 C3.2 8.666,25.395 8.666,24.184 C4.1 ; R4.1 11.369,28.905 R4.1@11.415,28.859 ; IC1.13@11.465,25.543 11.465,25.943 IC1.13 ; IC1.13@11.582,27.426 IC1.13@11.652,27.356 ; R3.1@14.737,28.905 14.783,28.859 R3.1 15.691,28.846 15.961,28.575 R5.1 ; C8.1 C8.1@15.792,24.976 ; IC4.7@19.302,26.615 IC4.7 IC4.7@19.592,26.905 ; PAD4.1@19.592,28.939 PAD4.1
GPSPWRCTRL: IC5.35 | length 8
  Top Layer w0.254: 1.372,12.522 4.168,15.319 ; 4.293,15.319 4.168,15.319 ; IC5.35 7.851,15.89 7.304,15.89 6.734,15.319 4.168,15.319
KEETLED: IC5.34 R18.1 | length 1.3
  Top Layer w0.254: R18.1 6.875,16.413 IC5.34
MISO: IC5.2 P1.1 | length 7.3
  Top Layer w0.254: P1.1 4.007,6.452 7.288,9.733 9.04,9.733 9.251,9.944 9.251,10.49 IC5.2
MOSI: IC5.1 P1.4 | length 11.4
  Top Layer w0.254: P1.4 2.642,5.105 2.642,7.001 3.312,7.671 4.651,7.671 7.12,10.14 8.751,10.14 8.774,10.163 IC5.1
NetC1_1: C1.1 IC1.3 | length 1.2
  Top Layer w0.254: IC1.3 13.588,26.27 14.03,26.27 14.078,26.222 14.081,26.222 14.143,26.16 14.598,26.16 C1.1
NetC1_2: C1.2 IC1.1 IC1.2 L1.1 | length 4.4
  Top Layer w0.305: IC1.1 13.81,25.293 13.813,25.291 13.813,25.156 13.991,24.977 C1.2 ; L1.1@13.589,22.453 L1.1@13.817,22.225
  Top Layer w0.75: L1.1@13.565,22.834 IC1.1 13.565,25.543
NetC6_1: C6.1 IC1.5 R1.1 R5.2 | length 6.1
  Top Layer w0.254: IC1.5 13.588,27.27 14.179,27.27 14.358,27.091 15.57,27.091 15.961,27.483 R1.1 R1.1@16.108,27.483 ; C6.1 16.833,26.077 16.75,26.16 16.75,26.668 16.284,27.134 16.284,27.31 16.111,27.483 R1.1@16.108,27.483 ; R5.2 17.061,28.575 16.691,28.204 16.691,28.129 16.281,27.72 16.281,27.656 R1.1@16.108,27.483
NetC8_2: C8.2 IC1.4 | length 2.4
  Top Layer w0.254: IC1.4 13.588,26.77 14.105,26.77 14.308,26.566 15.622,26.566 C8.2
NetC10_2: C10.2 IC2.4 | length 1.2
  Top Layer w0.305: C10.2 26.72,21.733 26.72,22.914 IC2.4
NetC14_1: C14.1 D2.1 IC5.37 R9.2 R10.1 | length 6.8
  Top Layer w0.254: C14.1@4.464,12.132 C14.1 ; D2.1@5.461,12.088 5.416,12.132 C14.1 ; IC5.37 6.057,14.913 5.734,14.59 5.659,14.59 5.486,14.417 R10.1 5.486,14.267 5.313,14.094 5.238,14.094 4.386,13.242 R9.2 4.318,12.215 4.235,12.132 C14.1
NetC18_2: C18.2 IC5.7 Y1.2 | length 5
  Top Layer w0.254: Y1.2 12.017,6.34 C18.2 12.088,8.123 12.088,9.468 11.797,9.76 11.797,10.49 IC5.7
NetC19_2: C19.2 IC5.8 Y1.1 | length 5
  Top Layer w0.254: IC5.8 12.297,10.49 12.297,9.834 12.495,9.636 12.495,9.597 12.497,9.595 12.497,8.966 12.888,8.575 12.888,8.169 C19.2 13.005,6.007 Y1.1
NetD3_2: D3.2 Q3.3
NetIC1_6: IC1.6 R3.2 | length 1.5
  Top Layer w0.254: IC1.6@13.815,27.793 IC1.6 13.588,27.77 14.758,27.77 R3.2
NetIC2_3: IC2.3 M2.1 R8.2 | length 3.4
  Top Layer w0.305: M2.1@26.413,26.855 26.413,26.759 26.736,26.436 IC2.3 ; M2.1@26.598,26.955 M2.1 26.397,26.88 27.662,26.88 R8.2
NetIC3_8: IC3.8 R7.2 | length 1.2
  Top Layer w0.305: IC3.8 23.929,24.463 23.929,25.546 R7.2
NetIC5_9: IC5.9 Q2.3 R21.1 | length 17.5
  Top Layer w0.254: Q2.3 8.264,5.75 9.138,6.623 R21.1 9.197,7.078 9.559,7.078 10.363,6.274 10.363,4.518 10.512,4.369 14.736,4.369 14.884,4.518 14.884,8.153 14.122,8.915 13.751,8.915 12.901,9.766 12.901,9.805 12.797,9.909 12.797,10.49 IC5.9
NetIC5_10: IC5.10 R13.2 | length 15.5
  Top Layer w0.254: R13.2 9.472,2.819 10.615,3.962 14.98,3.962 15.367,4.35 15.367,8.875 14.514,9.728 13.513,9.728 13.345,9.897 13.345,9.936 13.297,9.984 13.297,10.49 IC5.10
NetIC5_11: IC5.11 R15.2 | length 16.9
  Top Layer w0.254: R15.2 7.843,1.854 9.081,1.854 10.783,3.556 15.148,3.556 15.824,4.232 15.824,9.347 14.966,10.206 13.797,10.206 13.774,10.229 IC5.11
NetIC5_12: IC5.12 R16.2 | length 17.8
  Top Layer w0.254: R16.2 7.864,1.012 8.035,1.012 8.038,1.016 8.839,1.016 10.871,3.048 15.215,3.048 16.281,4.115 16.281,9.779 14.648,11.413 IC5.12
NetLED1_1: LED1.1 R17.2 | length 1.9
  Top Layer w0.254: R17.2 5.601,19.279 LED1.1
NetM1_1: M1.1 R6.2 Z1.1 | length 7.2
  Top Layer w0.305: M1.1@5.241,26.98 5.207,26.946 5.207,26.563 3.856,25.212 3.318,25.212 3.466,25.064 3.466,25.059 5.63,22.894 R6.2
NetQ1_1: Q1.1 R18.2 R19.2 | length 0.8
  Top Layer w0.254: R18.2 R19.2
NetQ1_3: Q1.3 R17.1 | length 2.1
  Top Layer w0.254: R17.1 3.597,19.219 Q1.3
NetQ2_1: Q2.1 R12.1 R20.2 | length 5.4
  Top Layer w0.254: Q2.1 Q2.1@6.292,6.005 ; R12.1 6.737,6.478 6.587,6.328 6.587,6.278 6.314,6.005 Q2.1@6.292,6.005 ; R20.2 8.946,4.492 8.83,4.375 7.614,4.375 6.565,5.424 6.565,5.732 Q2.1@6.292,6.005
NetQ3_1: Q3.1 Q4.3 R22.1
NetQ4_1: Q4.1 R23.1 R24.1
NETRX: R13.1 R14.2
NETTX: Q2.2 R20.1 | length 3.4
  Top Layer w0.254: Q2.2 6.314,4.105 6.732,3.687 R20.1
OBDPWRCTRL: IC5.13 R23.2
OBDRX: R16.1
OBDTX: R15.1
OBDV5V: C21.1 C22.1 D3.1
PWRKEY: IC5.31 | length 16.9
  Top Layer w0.254: 1.372,13.792 1.473,13.792 2.642,14.961 2.642,19.583 3.632,20.574 9.22,20.574 9.5,20.295 9.5,18.313 9.774,18.039 IC5.31
RST: IC5.4 P1.5 R11.2 | length 13.5
  Top Layer w0.254: P1.5 3.988,2.456 5.424,3.892 5.424,6.719 7.625,8.92 8.153,8.92 ; R11.2 8.133,8.9 8.153,8.92 ; IC5.4 10.251,10.49 10.251,9.71 9.462,8.92 8.153,8.92
SCK: IC5.3 P1.3 | length 10.1
  Top Layer w0.254: P1.3 4.211,4.135 4.211,4.78 4.854,5.422 5.017,5.586 5.017,6.887 7.457,9.327 9.276,9.327 9.774,9.825 IC5.3
V4V: C12.1 C13.1 C15.1 C16.2 C17.1 C20.2 D1.1 D1.2 IC4.1 IC5.5 IC5.17 IC5.27 IC5.29 IC5.38 LED1.2 M2.3 P1.2 R11.1 R12.2 R21.2 | length 20.6
  Top Layer w0.254: C13.1 6.704,14.266 6.851,14.413 IC5.38 ; R12.2 R21.2 8.436,7.235 8.436,7.394 8.88,7.839 8.88,8.073 R11.1 9.728,8.23 10.358,8.859 10.416,8.859 10.589,9.032 C20.2 ; C15.1 10.143,18.618 10.771,17.991 10.771,17.316 IC5.29 ; C20.2@10.64,9.144 10.681,9.144 10.762,9.225 10.762,9.339 10.797,9.374 10.797,10.49 IC5.5 ; IC5.27 11.797,17.336 11.797,17.881 12.128,18.212 12.588,18.212 13.123,18.747 C17.1 ; IC5.17 15.611,13.913 15.768,13.755 15.768,13.655 15.851,13.572 C16.2
  Top Layer w0.305: 20.686,25.984 20.686,26.165 20.663,26.187 IC4.1 20.597,26.21 20.978,26.21 21.184,26.416 21.593,26.416 C12.1 21.618,26.441 22.596,26.441
  Top Layer w0.508: D1.2 20.686,25.984 ; D1.1 22.596,26.441 22.596,27.005 23.435,27.844 24.152,27.844 M2.3
V5V: C6.2 C7.2 C11.1 D1.3 IC3.1 IC3.2 IC4.6 L1.2 Q3.2 R1.2 R22.2 | length 16
  Top Layer w0.305: C6.2 16.887,24.998 18.061,24.998 C11.1 ; 17.12,27.153 17.12,27.026 17.935,26.21 18.451,26.21 IC4.6 18.359,26.187 18.336,26.165 18.44,26.165 18.44,25.933 ; L1.2@17.171,22.479 17.314,22.622 ; R1.2@17.211,27.483 R1.2 R1.2@17.284,27.335
  Top Layer w0.508: 18.44,25.933 18.44,25.908 18.128,25.596 18.128,25.065 C11.1 18.082,24.089 18.363,23.808 C7.2
  Top Layer w0.635: 19.019,22.479 D1.3@21.573,22.479 ; D1.3 21.641,22.257 21.658,22.239 21.948,22.239 22.775,21.412 24.206,21.412
  Top Layer w1: L1.2@17.171,22.479 19.019,22.479 19.019,23.808 C7.2
V12V: C2.2 C3.1 C4.2 C5.2 IC1.9 IC1.10 IC2.2 M1.2 R2.2 R9.1 Z1.3 | length 16.3
  Top Layer w0.254: 9.779,26.568 9.779,24.798 10.27,24.306 C5.2 ; IC1.10@10.551,26.293 IC1.10 ; IC1.10@10.696,26.293 10.719,26.316 10.719,26.568
  Top Layer w0.305: C2.2@6.907,27.125 7.186,27.405 7.186,27.996 7.334,28.143 R2.2 ; C4.2 7.212,24.257 Z1.3 5.518,25.584 6.592,26.658 7.16,26.658 7.299,26.797 C2.2
  Top Layer w0.508: M1.2 5.466,28.951 5.537,28.88 5.537,28.245 5.931,27.851 6.18,27.851 6.907,27.125 7.234,26.797 C2.2@7.299,26.797 ; C2.2 C3.1 8.696,26.746 9.22,26.746 9.398,26.568 9.779,26.568 10.719,26.568
pads on no net: *.1 *.2 *.3 *.4 *.5 *.6 *.7 *.8 *.9 *.10 *.11 *.12 *.13 *.14 *.15 *.16 IC1.11 IC2.6 IC3.5 IC3.7 IC4.2 IC4.5 IC5.14 IC5.15 IC5.16 IC5.19 IC5.20 IC5.21 IC5.22 IC5.23 IC5.24 IC5.25 IC5.26 IC5.30 IC5.32 IC5.36 IC5.40 IC5.41 IC5.42 IC5.43 IC5.44 Z1.2

## Polygon pours and split planes (outlines as drawn)
GND on Top Layer "GND_L01_P000" (solid, remove dead copper, pour order 0): 0.457,29.796 0.457,21.338 10.737,21.338 11.27,21.338 11.27,21.008 11.27,20.195 11.93,19.535 29.901,19.535 29.901,29.796

## Silkscreen, mask and mechanical layers (free items; w line width, h text height)
Top Overlay:
  lines w0.254: 9.576,22.835 9.576,25.349 9.906,25.679 9.931,25.679 ; 10.795,23.647 10.795,23.52 11.151,23.165 11.151,22.606 ; 14.605,24.46 17.247,24.46 17.526,24.181 17.526,19.71 ; 17.628,27.559 17.729,27.559 18.263,28.092 18.263,28.423 ; 19.482,25.044 19.914,25.044 ; 19.914,20.574 19.914,25.578
  text "B" at 20.726,28.6 h0.89
Mechanical 13:
  lines w0.254: 10.033,0.152 10.033,20 30,20

## Text inside footprints (layer, text, board x,y; h text height)
*: Top Overlay "1" at -2.39,2.922 h1.52 r90
P1: Top Overlay "1" at 4.496,8.484 h0.89 r90; Top Overlay "2" at 1.956,8.992 h0.89 r90; Top Overlay "5" at 4.496,-0.152 h0.89 r90; Top Overlay "6" at 1.956,-0.152 h0.89 r90